# Altium PCB PCB_SAE_4_5.pcbdoc
Units mm, origin at the board's own origin, x right, y up, seen from the top; angles counter-clockwise.
Board outline 112.75 x 87.29 mm, 2 copper layers (Top Layer, Bottom Layer); 15 components, 44 nets, 94 pads, 3 vias.
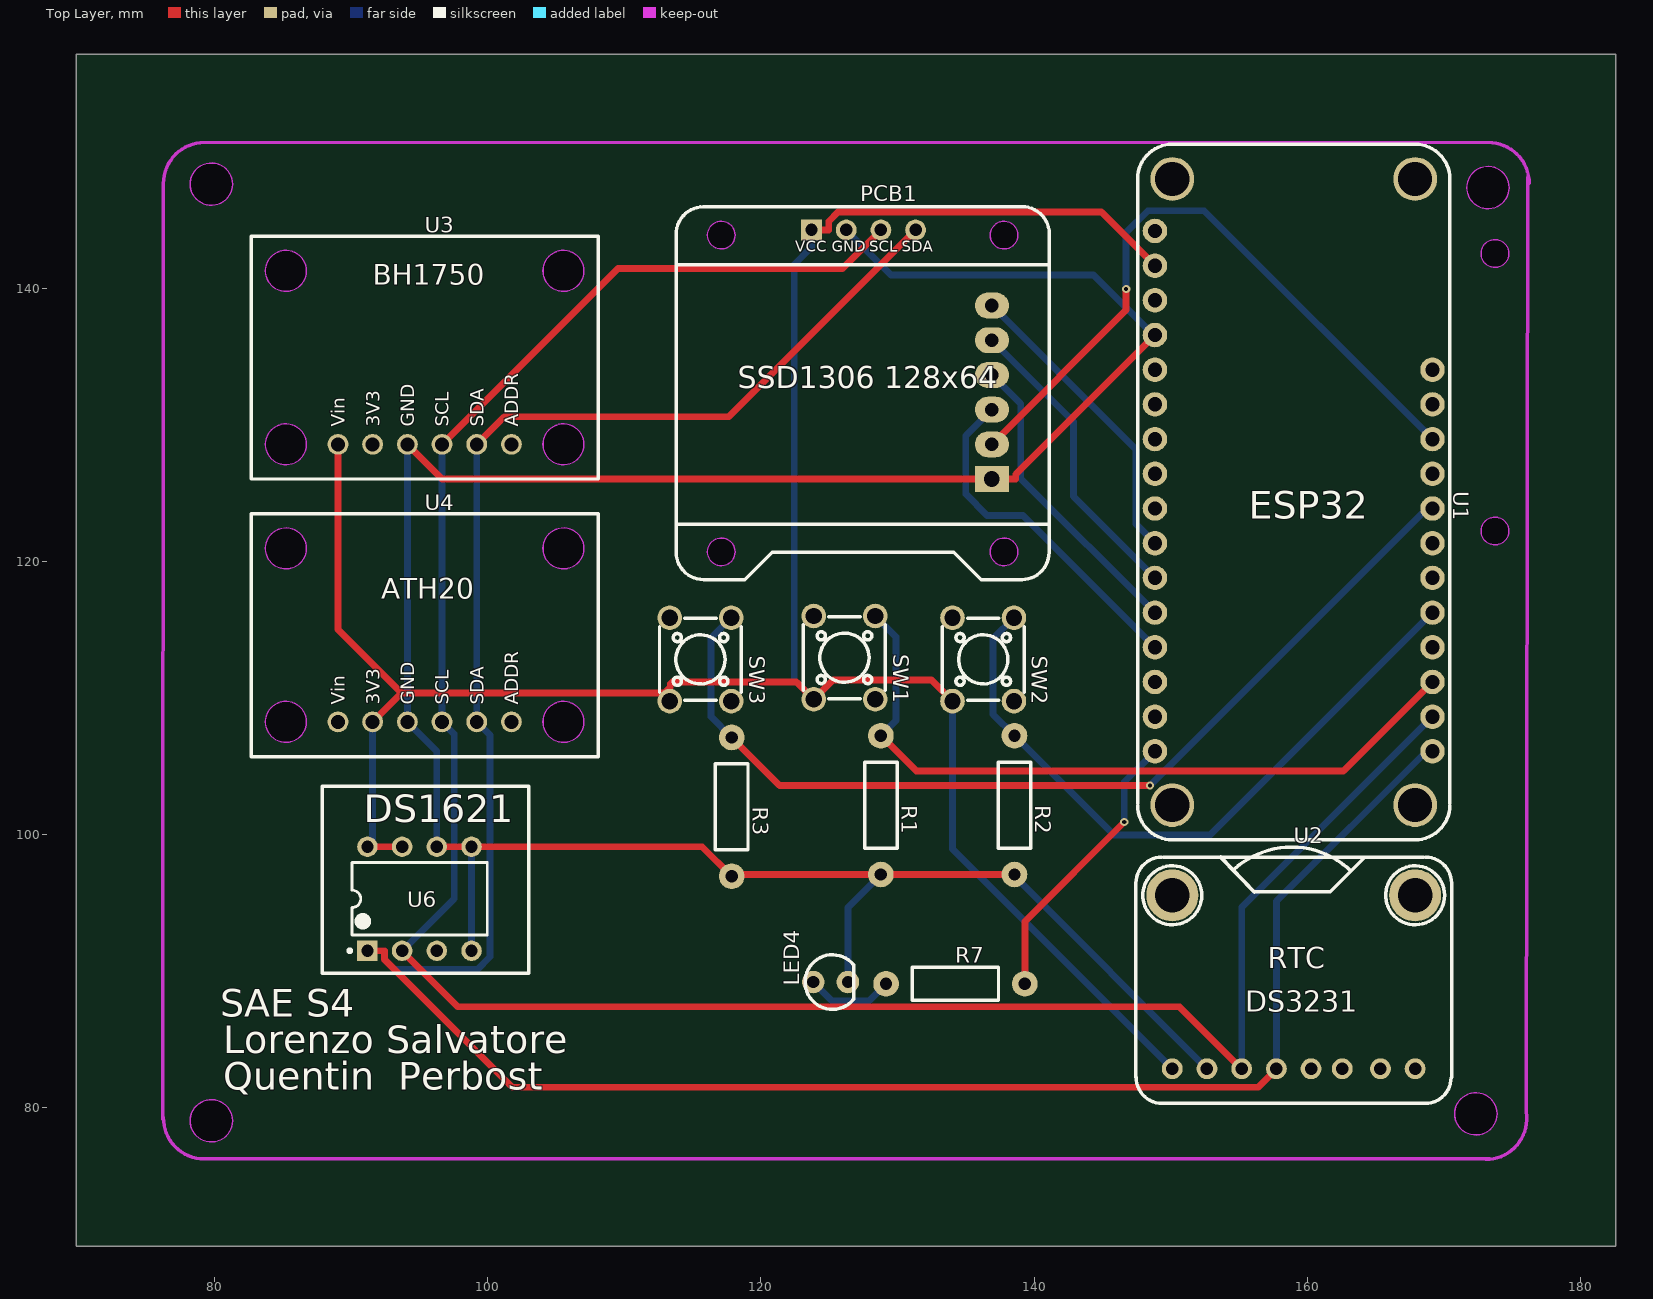
[diagram p0: Top Layer view]
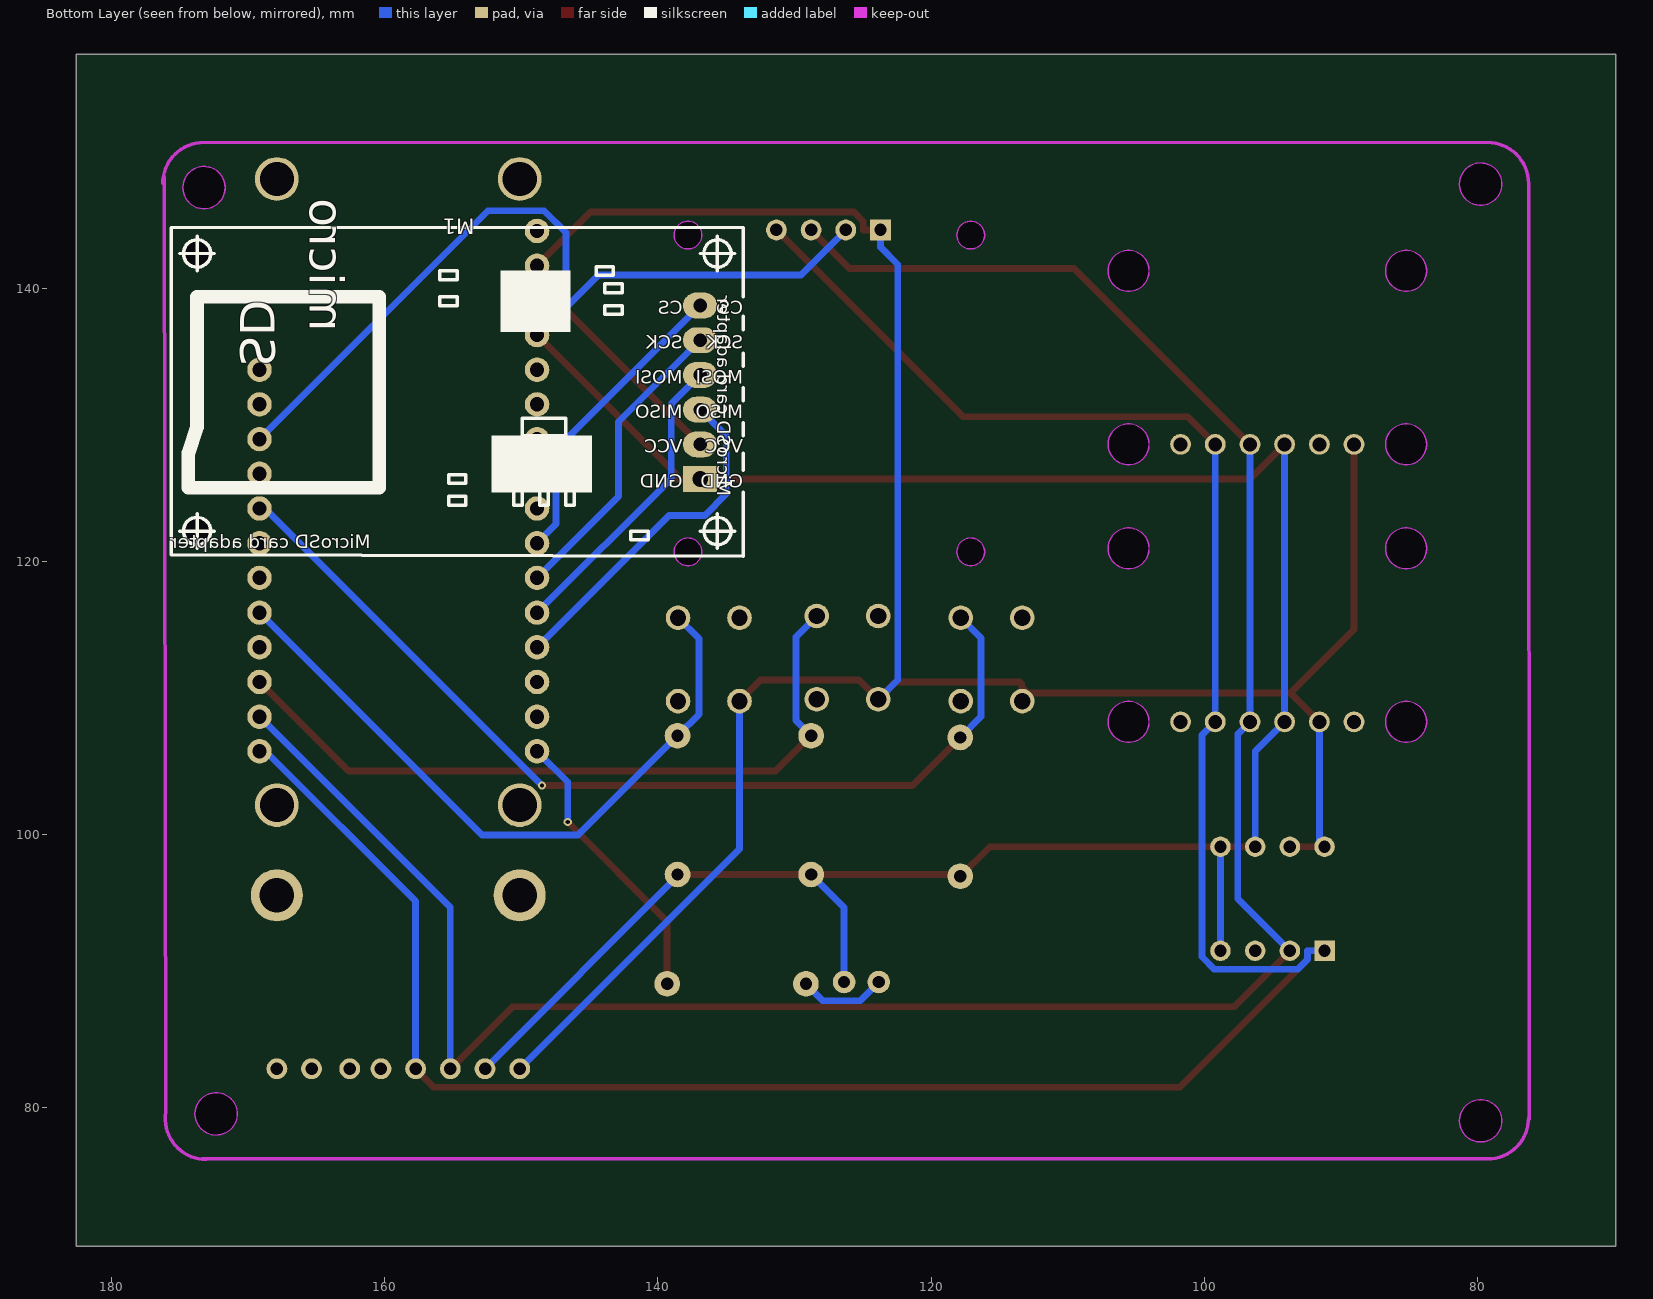
[diagram p1: Bottom Layer view, seen from below]

## Layer stack, top to bottom
Top Layer: signal copper (thickness not stored)
Dielectric: dielectric 0.32, FR-4, Dk 4.8
Bottom Layer: signal copper (thickness not stored)

## Board outline
182.598,69.85 69.85,69.85 69.85,157.138 182.598,157.138
cut-out: 81.306,147.613 cw(c79.756,147.613) 78.206,147.613 cw(c79.756,147.613)
cut-out: 81.306,79.033 cw(c79.756,79.033) 78.206,79.033 cw(c79.756,79.033)
cut-out: 173.889,79.541 cw(c172.339,79.541) 170.789,79.541 cw(c172.339,79.541)
cut-out: 174.778,147.359 cw(c173.228,147.359) 171.678,147.359 cw(c173.228,147.359)
cut-out: 174.752,142.533 cw(c173.736,142.533) 172.72,142.533 cw(c173.736,142.533)
cut-out: 174.752,122.213 cw(c173.736,122.213) 172.72,122.213 cw(c173.736,122.213)

## Design rules (kind name [scope] priority, off if disabled: settings)
BoardOutlineClearance Default [All] p0: genericclearance=0.254 ignorepadtopadclearanceinfootprint=FALSE except(0: Region-CutoutEdge Arc-SplitContinuation Track-SplitContinuation SMDPad-SplitContinuation THPad-SplitContinuation Via-SplitContinuation Fill-SplitContinuation Poly-SplitContinuation Region-SplitContinuation Text-SplitContinuation; 0.249: Track-OutlineEdge SMDPad-OutlineEdge THPad-OutlineEdge Via-OutlineEdge Fill-OutlineEdge Region-OutlineEdge Poly-OutlineEdge Text-OutlineEdge Sheet-OutlineEdge Hole-OutlineEdge Track-CutoutEdge SMDPad-CutoutEdge THPad-CutoutEdge Via-CutoutEdge Fill-CutoutEdge Poly-CutoutEdge Text-CutoutEdge Sheet-CutoutEdge Hole-CutoutEdge)
Clearance Default [All] p1: gap=0.178 ignorepadtopadclearanceinfootprint=FALSE except(0: Region-Region; 0.249: Track-Track SMDPad-Track THPad-Track Via-Track Fill-Track Region-Track Poly-Track Text-Track Sheet-Track Hole-Track Track-SMDPad SMDPad-SMDPad THPad-SMDPad Via-SMDPad Fill-SMDPad Region-SMDPad Poly-SMDPad Text-SMDPad Sheet-SMDPad Hole-SMDPad Track-THPad SMDPad-THPad THPad-THPad Via-THPad Fill-THPad Region-THPad Poly-THPad Text-THPad Sheet-THPad Hole-THPad Track-Via SMDPad-Via THPad-Via Via-Via Fill-Via Region-Via Poly-Via Text-Via Sheet-Via Hole-Via Track-Fill SMDPad-Fill THPad-Fill Via-Fill Fill-Fill Region-Fill Poly-Fill Text-Fill Sheet-Fill Hole-Fill Track-Region SMDPad-Region THPad-Region Via-Region Fill-Region Poly-Region Text-Region Sheet-Region Hole-Region Track-Poly SMDPad-Poly THPad-Poly Via-Poly Fill-Poly Region-Poly Poly-Poly Text-Poly Sheet-Poly Hole-Poly Track-Text SMDPad-Text THPad-Text Via-Text Fill-Text Region-Text Poly-Text Text-Text Sheet-Text Hole-Text Track-Sheet SMDPad-Sheet THPad-Sheet Via-Sheet Fill-Sheet Region-Sheet Poly-Sheet Text-Sheet Sheet-Sheet Hole-Sheet Track-Hole SMDPad-Hole THPad-Hole Via-Hole Fill-Hole Region-Hole Poly-Hole Text-Hole Sheet-Hole Hole-Hole)
PasteMaskExpansion Common [All] p1: expansion=0
PlaneConnect Default [All] p1: planeconnectstyle=Relief reliefexpansion=0.508 reliefentries=4 reliefconductorwidth=0 reliefairgap=0.025
PolygonConnect Default [All] p1: connectstyle=Relief reliefentries=4 reliefconductorwidth=0 polygonreliefangle="90 Angle" airgapwidth=10
PolygonConnect gge9773 [All] p1: connectstyle=Relief reliefentries=4 reliefconductorwidth=0 polygonreliefangle="90 Angle" airgapwidth=10
RoutingVias Default [All] p1: viastyle="Through Hole" holewidth=12.008000000000001 minholewidth=12.008000000000001 maxholewidth=2362 width=24.016000000000002 minwidth=24.016000000000002 maxwidth=3938
SolderMaskExpansion Common [All] p1: useseparateexpansions=TRUE expansion=2 expansionbottom=2
Width Default [All] p1: maxlimit=1000 minlimit=20 preferedwidth=20

## Components (designator, comment, footprint, x,y, rotation, side; value= is the part's Value field where it differs from the comment)
LED4 "LED-TH-3mm_B" LED-TH_BD3.0_BLUE 125.095,89.193 r90 top
M1 "Adaptateur micro SD" MICROSD_ADAPTER_BOARD 136.906,126.023 r180 bottom locked
PCB1 "SSD1306-128X64-OLED-SPI COPY" SSD1306 113.792,118.657 r0 top
R1 "1k" R_AXIAL-0.4 128.778,102.147 r270 top
R2 "1k" R_AXIAL-0.4 138.557,102.147 r270 top
R3 "1k" R_AXIAL-0.4 117.856,102.02 r270 top
R7 "1k" R_AXIAL-0.4 134.239,89.066 r0 top
SW1 "Button-6x6x6mm" SW-TH_4P-L6.0-W6.0-P4.50-LS6.1 126.111,112.942 r270 top
SW2 "Button-6x6x6mm" SW-TH_4P-L6.0-W6.0-P4.50-LS6.1 136.271,112.815 r270 top
SW3 "Button-6x6x6mm" SW-TH_4P-L6.0-W6.0-P4.50-LS6.1 115.57,112.815 r270 top
U1 "Feather ESP32" "ADAFRUIT FEATHER ESP32" 147.574,150.534 r270 top locked
U2 "RTC-DS3231-ADAFRUIT" RTC-DS3231-ADAFRUIT 159.004,89.193 r0 top
U3 "BH1750 - Adafruit" "BH1750 - ADAFRUIT" 82.677,126.023 r0 top
U4 "ATH20- Adafruit" "BH1750 - ADAFRUIT" 82.677,105.703 r0 top
U6 "DS1621+" DIP-8_L9.8-W6.6-P2.54-LS7.6-BL 94.996,95.289 r0 top

## Footprints (in the part's own frame and the unit in brackets; to place one, negate y for a bottom-side part, rotate by r counter-clockwise, add the part's x,y. Pads: shape width x height; smd on the part's side, far side on the other; paste and mask are expansions set on the pad)
"ADAFRUIT FEATHER ESP32" [mil]
  round 70.5 hole 41.4: 1(250,50) 2(350,50) 3(450,50) 4(550,50) 5(650,50) 6(750,50) 7(850,50) 8(950,50) 9(1050,50) 10(1150,50) 11(1250,50) 12(1350,50) 13(1450,50) 14(1550,50) 15(1650,50) 16(1750,50) 17(1750,850) 18(1650,850) 19(1550,850) 20(1450,850) 21(1350,850) 22(1250,850) 23(1150,850) 24(1050,850) 25(950,850) 26(850,850) 27(750,850) 28(650,850)
  round 125.98 hole 98.43: 29(100,800) 29(100,100) 29(1905,800) 29(1905,100)
  silkscreen extent 0,0 2005,900
"BH1750 - ADAFRUIT" [mil]
  round 60 hole 40.16: 1(250,100) 2(350,100) 3(450,100) 4(550,100) 5(650,100) 6(750,100)
  Board Outline Layer circle w0.2: c100,600 r59.05
  Board Outline Layer circle w0.2: c900,600 r59.05
  Board Outline Layer circle w0.2: c900,100 r59.05
  Board Outline Layer circle w0.2: c100,100 r59.05
  Board Outline Layer region: 159.05,600 153.21,574.38 136.82,553.83 113.14,542.43 86.86,542.43 63.18,553.83 46.79,574.38 40.95,600 40.95,600 46.79,625.62 63.18,646.17 86.86,657.57 113.14,657.57 136.82,646.17 153.21,625.62 159.05,600
  Board Outline Layer region: 959.06,600 953.21,574.38 936.82,553.83 913.14,542.43 886.86,542.43 863.18,553.83 846.79,574.38 840.95,600 840.95,600 846.79,625.62 863.18,646.17 886.86,657.57 913.14,657.57 936.82,646.17 953.21,625.62 959.06,600
  Board Outline Layer region: 959.06,100 953.21,74.38 936.82,53.83 913.14,42.43 886.86,42.43 863.18,53.83 846.79,74.38 840.95,100 840.95,100 846.79,125.62 863.18,146.17 886.86,157.57 913.14,157.57 936.82,146.17 953.21,125.62 959.06,100
  Board Outline Layer region: 159.05,100 153.21,74.38 136.82,53.83 113.14,42.43 86.86,42.43 63.18,53.83 46.79,74.38 40.95,100 40.95,100 46.79,125.62 63.18,146.17 86.86,157.57 113.14,157.57 136.82,146.17 153.21,125.62 159.05,100
  Multi-Layer board cut-out: 159.05,600 153.21,574.38 136.82,553.83 113.14,542.43 86.86,542.43 63.18,553.83 46.79,574.38 40.95,600 40.95,600 46.79,625.62 63.18,646.17 86.86,657.57 113.14,657.57 136.82,646.17 153.21,625.62 159.05,600
  Multi-Layer board cut-out: 959.06,600 953.21,574.38 936.82,553.83 913.14,542.43 886.86,542.43 863.18,553.83 846.79,574.38 840.95,600 840.95,600 846.79,625.62 863.18,646.17 886.86,657.57 913.14,657.57 936.82,646.17 953.21,625.62 959.06,600
  Multi-Layer board cut-out: 959.06,100 953.21,74.38 936.82,53.83 913.14,42.43 886.86,42.43 863.18,53.83 846.79,74.38 840.95,100 840.95,100 846.79,125.62 863.18,146.17 886.86,157.57 913.14,157.57 936.82,146.17 953.21,125.62 959.06,100
  Multi-Layer board cut-out: 159.05,100 153.21,74.38 136.82,53.83 113.14,42.43 86.86,42.43 63.18,53.83 46.79,74.38 40.95,100 40.95,100 46.79,125.62 63.18,146.17 86.86,157.57 113.14,157.57 136.82,146.17 153.21,125.62 159.05,100
  silkscreen extent 0,0 1000,700
DIP-8_L9.8-W6.6-P2.54-LS7.6-BL [mm]
  rect 1.5x1.5 hole 0.9: 1(-3.81,-3.81)
  round 1.5 hole 0.9: 2(-1.27,-3.81) 3(1.27,-3.81) 4(3.81,-3.81) 5(3.81,3.81) 6(1.27,3.81) 7(-1.27,3.81) 8(-3.81,3.81)
  silkscreen extent -5.23,-3.93 4.96,2.65
LED-TH_BD3.0_BLUE [mil]
  round 65 hole 35.43: 1(0,50) 2(0,-50)
  silkscreen extent -79,-66 79,73
MICROSD_ADAPTER_BOARD [mm]
  rect 2.5x1.9 hole 1.138: 1(0,0)
  oval 2.5x1.9 hole 1: 2(0,2.54) 3(0,12.7) 4(0,5.08) 5(0,7.62) 6(0,10.16)
  silkscreen extent -38.73,-5.67 3.18,18.42
R_AXIAL-0.4 [mil]
  round 74 hole 35.4: 1(-200,0) 2(200,0)
  silkscreen extent -124,-47 124,47
RTC-DS3231-ADAFRUIT [mil]
  round 60 hole 36: 1(-350,-250) 2(-250,-250) 3(-150,-250) 4(-50,-250) 5(50,-250) 6(140,-250) 7(250,-250) 8(350,-250)
  round 150 hole 100: 9(-350,250) 9(350,250)
  silkscreen extent -455,-350 455,389
SSD1306 [mil]
  rect 60x60 hole 36: 1(390,1007.87)
  round 60 hole 36: 2(490,1007.9) 3(590,1007.9) 4(690,1007.9)
  Board Outline Layer circle w0.2: c130,80 r40
  Board Outline Layer circle w0.2: c945,80 r40
  Board Outline Layer circle w0.2: c130,993 r40
  Board Outline Layer circle w0.2: c945,993 r40
  Board Outline Layer region: 170,80 166.04,62.64 154.94,48.73 138.9,41 121.1,41 105.06,48.73 93.96,62.64 90,80 90,80 93.96,97.36 105.06,111.27 121.1,119 138.9,119 154.94,111.27 166.04,97.36 170,80
  Board Outline Layer region: 985,80 981.04,62.64 969.94,48.73 953.9,41 936.1,41 920.06,48.73 908.96,62.64 905,80 905,80 908.96,97.36 920.06,111.27 936.1,119 953.9,119 969.94,111.27 981.04,97.36 985,80
  Board Outline Layer region: 170,993 166.04,975.64 154.94,961.73 138.9,954 121.1,954 105.06,961.73 93.96,975.64 90,993 90,993 93.96,1010.36 105.06,1024.27 121.1,1032 138.9,1032 154.94,1024.27 166.04,1010.36 170,993
  Board Outline Layer region: 985,993 981.04,975.64 969.94,961.73 953.9,954 936.1,954 920.06,961.73 908.96,975.64 905,993 905,993 908.96,1010.36 920.06,1024.27 936.1,1032 953.9,1032 969.94,1024.27 981.04,1010.36 985,993
  Multi-Layer board cut-out: 170,80 166.04,62.64 154.94,48.73 138.9,41 121.1,41 105.06,48.73 93.96,62.64 90,80 90,80 93.96,97.36 105.06,111.27 121.1,119 138.9,119 154.94,111.27 166.04,97.36 170,80
  Multi-Layer board cut-out: 985,80 981.04,62.64 969.94,48.73 953.9,41 936.1,41 920.06,48.73 908.96,62.64 905,80 905,80 908.96,97.36 920.06,111.27 936.1,119 953.9,119 969.94,111.27 981.04,97.36 985,80
  Multi-Layer board cut-out: 170,993 166.04,975.64 154.94,961.73 138.9,954 121.1,954 105.06,961.73 93.96,975.64 90,993 90,993 93.96,1010.36 105.06,1024.27 121.1,1032 138.9,1032 154.94,1024.27 166.04,1010.36 170,993
  Multi-Layer board cut-out: 985,993 981.04,975.64 969.94,961.73 953.9,954 936.1,954 920.06,961.73 908.96,975.64 905,993 905,993 908.96,1010.36 920.06,1024.27 936.1,1032 953.9,1032 969.94,1024.27 981.04,1010.36 985,993
  silkscreen extent 0,0 1075,1075
SW-TH_4P-L6.0-W6.0-P4.50-LS6.1 [mm]
  round 1.8 hole 1.2: 1(-3.05,2.25) 2(3.05,2.25) 3(-3.05,-2.25) 4(3.05,-2.25)
  silkscreen extent -3,-3 3,3

## Via types
v1: diameter 0.61, hole 0.305, Top Layer to Bottom Layer, 3 vias

## Nets (pads, with @x,y where several pads share a name; then routed paths per layer and width w, separated by ;. In a path a pad name is that pad's centre, name@x,y a point inside that pad or via, vN(x,y) a via of type N, cw(c..) or ccw(c..) an arc to the next point about the centre after c; other vN are vias at no path point)
3V3: LED4.2 M1.1 PCB1.2 R1.2 R2.2 R3.2 U1.4 U2.2 U3.3 U4.3 U6.4 U6.5 U6.6 | length 196.3
  Top Layer w0.5: U3.3 96.647,126.023 M1.1 138.657,126.023 138.657,126.376 U1.4 ; U6.6 U6.5 115.697,99.099 R3.2 117.983,97.067 R1.2 R2.2
  Bottom Layer w0.5: U3.3 U4.3 96.266,106.084 U6.6 ; U6.4 U6.5 ; PCB1.2 129.531,140.965 144.35,140.965 148.751,136.564 U1.4 ; LED4.2 126.365,94.654 R1.2 ; R2.2 138.557,96.94 U2.2
+5V: M1.2 U1.26 | length 49.6
  Top Layer w0.5: M1.2 146.733,138.39 v1(146.733,139.939)
  Bottom Layer w0.5: v1(146.733,139.939) 146.733,144.071 148.327,145.665 152.443,145.665 U1.26
ADDR: U4.6
DATA_1: R1.1 SW1.1 U1.19 | length 54
  Top Layer w0.5: R1.1 131.372,104.633 162.633,104.633 U1.19
  Bottom Layer w0.5: SW1.1 129.883,114.47 129.883,108.332 R1.1
DATA_2: R2.1 SW2.1 U1.21 | length 50.3
  Bottom Layer w0.5: SW2.1 136.99,114.334 136.99,108.794 R2.1 145.83,99.954 152.874,99.954 U1.21
DATA_3: R3.1 SW3.1 U1.24 | length 71.2
  Top Layer w0.5: R3.1 121.371,103.585 v1(148.485,103.585)
  Bottom Layer w0.5: SW3.1 116.337,114.382 116.337,108.619 R3.1 ; v1(148.485,103.585) 168.765,123.864 U1.24
DATA_6: R7.2 U1.16 | length 21
  Top Layer w0.5: R7.2 139.319,93.636 v1(146.596,100.913)
  Bottom Layer w0.5: v1(146.596,100.913) 146.596,103.836 U1.16
LED4_1: LED4.1 R7.1 | length 6.4
  Bottom Layer w0.5: LED4.1 125.197,87.821 127.914,87.821 R7.1
S$3370: 
SW1_2: SW1.2
SW1_3: SW1.3
SW2_2: SW2.2
SW2_3: SW2.3
SW3_2: SW3.2
SW3_3: SW3.3
U1_1: U1.1
U1_3: U1.3
U1_5: U1.5
U1_6: U1.6
U1_7: U1.7
U1_8: U1.8
U1_9: U1.9
U1_10: M1.3 U1.10 | length 22.3
  Bottom Layer w0.5: M1.3 147.447,128.182 147.447,122.721 U1.10
U1_11: M1.6 U1.11 | length 22.3
  Bottom Layer w0.5: M1.6 142.873,130.216 142.873,124.755 U1.11
U1_12: M1.5 U1.12 | length 22.3
  Bottom Layer w0.5: M1.5 139.015,131.534 139.015,126.073 U1.12
U1_13: M1.4 U1.13 | length 25.5
  Bottom Layer w0.5: M1.4 134.998,129.195 134.998,124.919 136.554,123.363 139.185,123.363 U1.13
U1_14: U1.14
U1_15: U1.15
U1_17: PCB1.4 U1.17 U2.4 U3.5 U4.5 U6.1 | length 186.7
  Top Layer w0.5: U6.1 92.437,91.479 92.437,90.854 101.802,81.488 156.379,81.488 U2.4 ; U3.5 101.2,130.576 117.637,130.576 PCB1.4
  Bottom Layer w0.5: U6.1 92.437,91.479 92.437,90.854 93.165,90.126 99.239,90.126 100.157,91.044 100.157,107.273 U4.5 U3.5 ; U2.4 157.734,95.11 168.708,106.084 U1.17
U1_18: PCB1.3 U1.18 U2.3 U3.4 U4.4 U6.2 | length 174.3
  Top Layer w0.5: U6.2 97.825,87.38 150.657,87.38 U2.3 ; U3.4 109.526,141.442 125.963,141.442 PCB1.3
  Bottom Layer w0.5: U6.2 97.536,95.289 97.536,107.354 U4.4 U3.4 ; U2.3 155.194,94.654 U1.18
U1_20: U1.20
U1_22: U1.22
U1_23: U1.23
U1_25: U1.25
U1_27: U1.27
U1_28: U1.28
U2_5: U2.5
U2_6: U2.6
U2_7: U2.7
U2_8: U2.8
U3_2: U3.2
U3_6: U3.6
U6_3: U6.3
VCC: PCB1.1 SW1.4 SW2.4 SW3.4 U1.2 U2.1 U3.1 U4.2 U6.7 U6.8 | length 184.6
  Top Layer w0.5: U3.1 89.027,115.001 93.676,110.352 ; U6.8 U6.7 ; U4.2 93.676,110.352 ; SW3.4@113.32,109.765 112.733,110.352 103.205,110.352 ; PCB1.1 124.961,144.257 124.961,144.888 125.645,145.573 144.915,145.573 U1.2 ; SW2.4@134.021,109.765 132.485,111.301 125.27,111.301 123.861,109.892 122.586,111.167 113.507,111.167 113.361,111.021 113.361,110.791 112.922,110.352 103.205,110.352 ; 93.676,110.352 103.205,110.352
  Bottom Layer w0.5: U6.8 91.567,99.48 U4.2 ; PCB1.1 123.698,142.994 122.435,141.732 122.435,111.318 SW1.4@123.861,109.892 ; SW2.4@134.021,109.765 134.021,98.936 U2.1
pads on no net: U1.29 U2.9 U4.1

## Polygon pours and split planes (outlines as drawn)
3V3 on Top Layer (solid, pour order 4): 78.613,150.661 78.359,150.661 78.105,150.407 77.724,150.407 77.597,150.28 77.597,150.153 77.343,149.899 77.089,149.645 76.708,149.264 76.708,149.137 76.454,148.883 76.454,148.375 76.327,148.248 76.327,78.652 76.327,78.271 76.454,78.144 76.454,77.89 76.708,77.636 76.962,77.382 76.962,77.255 77.216,77.001 77.47,77.001 77.724,76.747 77.851,76.747 78.105,76.493 78.232,76.493 78.359,76.366 173.99,76.366 174.117,76.366 174.371,76.62 174.752,76.62 175.006,76.874 175.006,77.001 175.133,77.128 175.26,77.255 175.26,77.382 175.514,77.636 175.514,77.89 175.641,78.017 175.641,78.144 175.768,78.271 175.768,78.398 175.895,78.525 175.895,147.613 176.022,147.74 176.022,148.248 176.022,148.629 175.895,148.756 175.895,149.01 175.768,149.137 175.514,149.391 175.26,149.645 175.006,149.899 174.879,149.899 174.625,150.153 174.498,150.153 174.244,150.407 173.99,150.407 173.863,150.534 78.994,150.534 78.74,150.788

## Keep-outs
Board Outline Layer:
  circle w0.005: c79.756,147.613 r1.55
  region: 81.306,147.613 cw(c79.756,147.613) 78.206,147.613 cw(c79.756,147.613)
  circle w0.005: c79.756,79.033 r1.55
  region: 81.306,79.033 cw(c79.756,79.033) 78.206,79.033 cw(c79.756,79.033)
  circle w0.005: c172.339,79.541 r1.55
  region: 173.889,79.541 cw(c172.339,79.541) 170.789,79.541 cw(c172.339,79.541)
  circle w0.005: c173.228,147.359 r1.55
  region: 174.778,147.359 cw(c173.228,147.359) 171.678,147.359 cw(c173.228,147.359)
  circle w0.005: c173.736,142.533 r1.016
  region: 174.752,142.533 cw(c173.736,142.533) 172.72,142.533 cw(c173.736,142.533)
  circle w0.005: c173.736,122.213 r1.016
  region: 174.752,122.213 cw(c173.736,122.213) 172.72,122.213 cw(c173.736,122.213)
  lines w0.254: 76.2,79.16 76.248,147.661 cw(c79.248,147.661) 79.248,150.661 173.248,150.661 cw(c173.248,147.661) 176.248,147.661 ; 76.248,79.286 ccw(c79.248,79.239) 79.248,76.239 ; 79.121,76.239 173.355,76.239 ; 173.059,76.2 ccw(c173.059,79.2) 176.022,79.668 176.149,148.121

## Silkscreen, mask and mechanical layers (free items; w line width, h text height)
Top Silkscreen Layer:
  lines w0.254 net S$3370: 88.9,103.544 102.997,103.544 102.997,89.828 87.884,89.828 87.884,103.544 89.281,103.544
  text "ESP32" at 155.702,123.102 h2.03
  text "DS1621" at 90.932,100.877 h2.03
  text "SAE S4" at 80.391,86.653 h2.03
  text "Lorenzo Salvatore" at 80.645,83.986 h2.03
  text "Quentin  Perbost" at 80.645,81.319 h2.03
Mechanical Layer:
  circle w0.005: c79.756,147.613 r1.55
  circle w0.005: c79.756,79.033 r1.55
  circle w0.005: c172.339,79.541 r1.55
  circle w0.005: c173.228,147.359 r1.55
  circle w0.005: c173.736,142.533 r1.016
  circle w0.005: c173.736,122.213 r1.016

## Text inside footprints (layer, text, board x,y; h text height)
M1: Bottom Silkscreen Layer "VCC" at 133.731,127.928 h1; Bottom Silkscreen Layer "GND" at 133.731,125.388 h1; Bottom Silkscreen Layer "CS" at 133.731,138.088 h1; Bottom Silkscreen Layer "SCK" at 133.731,135.548 h1; Bottom Silkscreen Layer "MISO" at 133.731,130.468 h1; Bottom Silkscreen Layer "MOSI" at 133.731,133.008 h1; Bottom Silkscreen Layer "MicroSD card adapter" at 161.036,120.943 h1; Bottom Silkscreen Layer "micro" at 165.481,136.818 h2.5 r90; Bottom Silkscreen Layer "SD" at 170.561,134.278 h2.5 r90; Bottom Silkscreen Layer "MicroSD card adapter" at 135.65,124.753 h1 r90; Bottom Silkscreen Layer "CS" at 138.176,138.088 h1; Bottom Silkscreen Layer "SCK" at 138.176,135.548 h1; Bottom Silkscreen Layer "MOSI" at 138.176,133.008 h1; Bottom Silkscreen Layer "MISO" at 138.176,130.468 h1; Bottom Silkscreen Layer "VCC" at 138.176,127.928 h1; Bottom Silkscreen Layer "GND" at 138.176,125.388 h1
PCB1: Top Silkscreen Layer "VCC" at 122.497,142.67 h0.8; Top Silkscreen Layer "GND" at 125.194,142.68 h0.8; Top Silkscreen Layer "SCL" at 127.942,142.68 h0.8; Top Silkscreen Layer "SDA" at 130.292,142.67 h0.8; Top Silkscreen Layer "SSD1306 128x64" at 118.293,132.657 h1.6
U2: Mech6 "GND" at 151.638,80.684 h0.76; Mech6 "Vin" at 149.352,84.113 h0.76; Mech6 "SDA" at 156.972,80.684 h0.76; Mech6 "SCL" at 154.261,84.115 h0.76; Mech6 "SQW" at 164.338,84.113 h0.76; Top Silkscreen Layer "RTC" at 157.099,90.209 h1.52; Top Silkscreen Layer "DS3231" at 155.448,87.034 h1.52; Mech6 "BAT" at 159.385,84.113 h0.76; Mech6 "32K" at 161.925,80.684 h0.76; Mech6 "RST" at 167.005,80.684 h0.76
U3: Top Silkscreen Layer "BH1750" at 91.567,140.247 h1.5; Top Silkscreen Layer "3V3" at 92.075,129.833 h1 r90; Top Silkscreen Layer "Vin" at 89.535,129.833 h1 r90; Top Silkscreen Layer "GND" at 94.615,129.833 h1 r90; Top Silkscreen Layer "SCL" at 97.155,129.833 h1 r90; Top Silkscreen Layer "SDA" at 99.695,129.833 h1 r90; Top Silkscreen Layer "ADDR" at 102.235,129.833 h1 r90
U4: Top Silkscreen Layer "ATH20" at 92.202,117.26 h1.5; Top Silkscreen Layer "3V3" at 92.075,109.513 h1 r90; Top Silkscreen Layer "Vin" at 89.535,109.513 h1 r90; Top Silkscreen Layer "GND" at 94.615,109.513 h1 r90; Top Silkscreen Layer "SCL" at 97.155,109.513 h1 r90; Top Silkscreen Layer "SDA" at 99.695,109.513 h1 r90; Top Silkscreen Layer "ADDR" at 102.235,109.513 h1 r90